# Allegro board motor_encoder_brd.brd
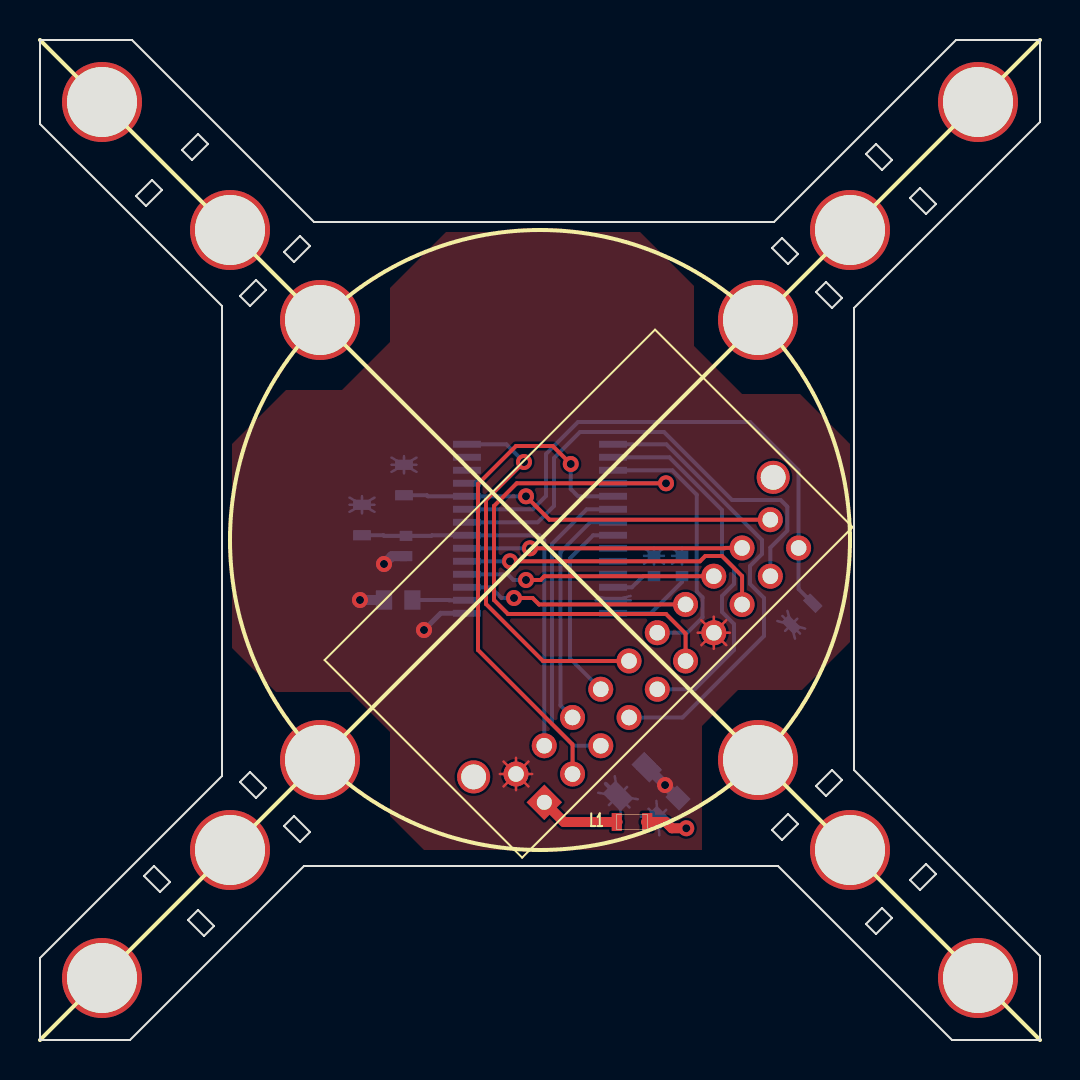
[diagram p0: board, top side]
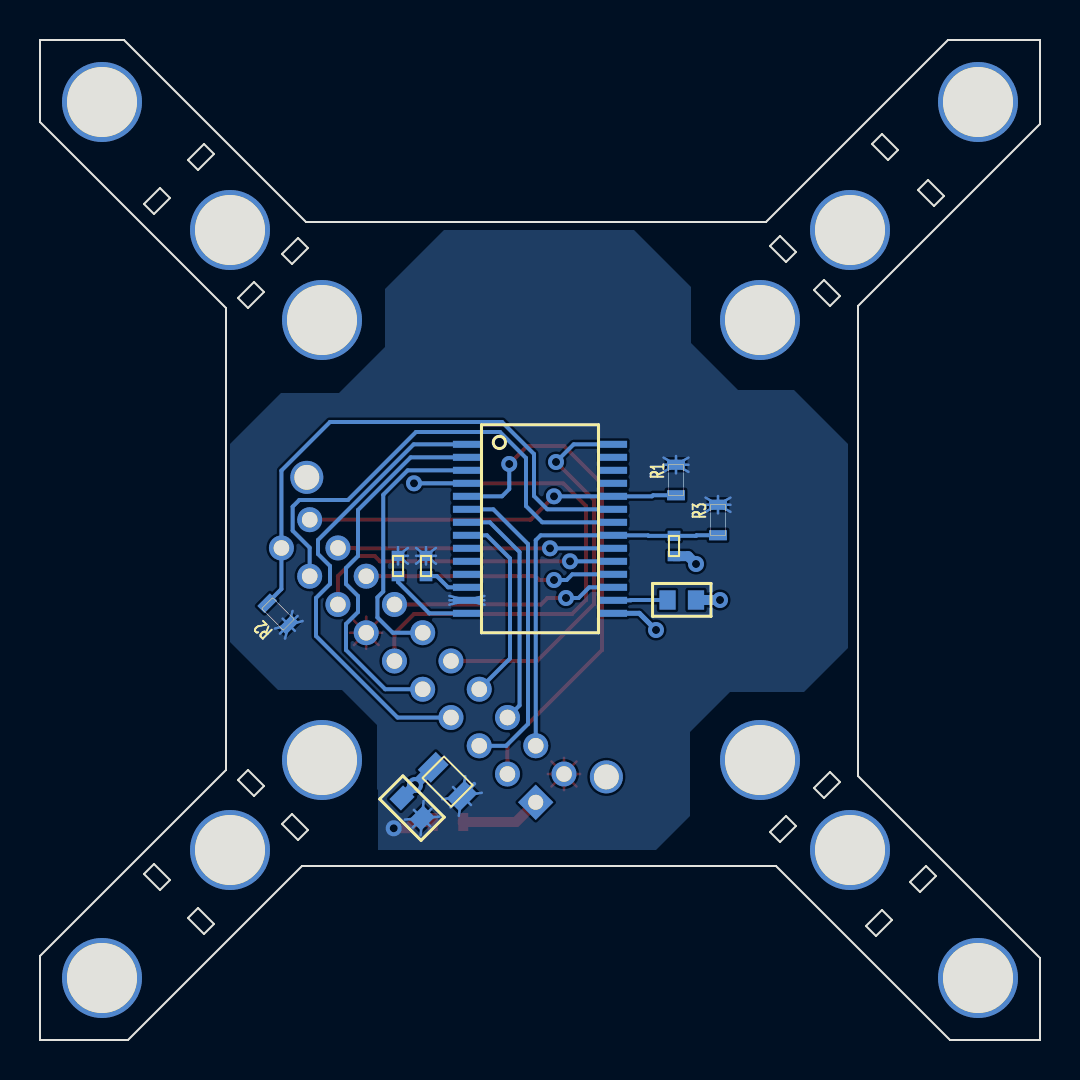
[diagram p1: board, bottom side, seen from below]

Outline 50 x 50 mm; copper layers: TOP, BOTTOM. Coordinates in mm from the lower left corner of the outline.
Outline path: 0,50 0,45.8 ; 0,50 0,45.8 ; 0,50 4.6,50 ; 0,50 4.6,50 ; 0,45.8 9.1,36.7 ; 0,45.8 9.1,36.7 ; 9.1,36.7 9.1,13.2 ; 9.1,36.7 9.1,13.2 ; 0,4.1 0,0 ; 0,4.1 0,0 ; 0,4.1 9.1,13.2 ; 0,4.1 9.1,13.2 ; 0,0 4.5,0 ; 0,0 4.5,0 ; 4.5,0 13.2,8.7 ; 4.5,0 13.2,8.7 ; 13.2,8.7 36.9,8.7 ; 13.2,8.7 36.9,8.7 ; 4.6,50 13.7,40.9 ; 4.6,50 13.7,40.9 ; 36.9,8.7 45.6,0 ; 36.9,8.7 45.6,0 ; 13.7,40.9 36.7,40.9 ; 13.7,40.9 36.7,40.9 ; 36.7,40.9 45.8,50 ; 36.7,40.9 45.8,50 ; 45.6,0 50,0 ; 45.6,0 50,0 ; 40.7,36.6 50,45.9 ; 40.7,36.6 50,45.9 ; 40.7,36.6 40.7,13.5 ; 40.7,36.6 40.7,13.5 ; 50,45.9 50,50 ; 50,45.9 50,50 ; 40.7,13.5 50,4.2 ; 40.7,13.5 50,4.2 ; 50,0 50,4.2 ; 50,0 50,4.2 ; 45.8,50 50,50 ; 45.8,50 50,50 ; 4.8,42.2 5.6,43 6.1,42.5 5.3,41.7 4.8,42.2 ; 5.2,8.2 5.7,8.7 6.5,7.9 6,7.4 5.2,8.2 ; 7.1,44.5 7.9,45.3 8.4,44.8 7.6,44 7.1,44.5 ; 7.4,6 7.9,6.5 8.7,5.7 8.2,5.2 7.4,6 ; 10,37.2 10.8,38 11.3,37.5 10.5,36.7 10,37.2 ; 10,12.9 10.5,13.4 11.3,12.6 10.8,12.1 10,12.9 ; 12.2,39.4 13,40.2 13.5,39.7 12.7,38.9 12.2,39.4 ; 12.2,10.7 12.7,11.2 13.5,10.4 13,9.9 12.2,10.7 ; 36.6,39.6 37.1,40.1 37.9,39.3 37.4,38.8 36.6,39.6 ; 36.6,10.5 37.4,11.3 37.9,10.8 37.1,10 36.6,10.5 ; 38.8,37.4 39.3,37.9 40.1,37.1 39.6,36.6 38.8,37.4 ; 38.8,12.7 39.6,13.5 40.1,13 39.3,12.2 38.8,12.7 ; 41.3,44.3 41.8,44.8 42.6,44 42.1,43.5 41.3,44.3 ; 41.3,5.8 42.1,6.6 42.6,6.1 41.8,5.3 41.3,5.8 ; 43.5,42.1 44,42.6 44.8,41.8 44.3,41.3 43.5,42.1 ; 43.5,8 44.3,8.8 44.8,8.3 44,7.5 43.5,8

## Design rules (mm)
constraint set DEFAULT: min track width 0.127

## Placement (name value [footprint] x y rotation side)
BR1  CIRCUIT BREAKER  [CAP0402]  18.3 24.7 90 bottom
BR2  CIRCUIT BREAKER  [CAP0402]  30.7 23.7 270 bottom
BR3  CIRCUIT BREAKER  [CAP0402]  32.1 23.7 270 bottom
C1  100n  [SMC0603]  17.2 22 0 bottom
C2  100n  [SMC0603]  31.9 12.1 225 bottom
C3  10u  [CAP0805]  28.9 12.2 45 bottom
J1  S20B-PADSS-1(LF)(SN)  [JST_PADSS_90DEG_10X2]  23.8 13.3 45 top
L1  BLM18PG300SN1D  [RES0603]  29.6 10.9 180 top
NOREF  -  []  9.5 40.5 0 top
NOREF#2  -  [unnamed#2]  14 14 0 top
NOREF#3  -  [unnamed#2]  46.9 3.1 0 top
NOREF#4  -  [unnamed#2]  3.1 46.9 0 top
NOREF#5  -  []  0 49.38 0 top
NOREF#6  -  [unnamed#2]  40.5 40.5 0 top
NOREF#7  -  [unnamed#2]  14 36 0 top
NOREF#8  -  []  14 36 0 top
NOREF#9  -  [unnamed#2]  35.9 14 0 top
NOREF#10  -  [unnamed#2]  9.5 40.5 0 top
NOREF#11  -  [unnamed#2]  40.5 9.5 0 top
NOREF#12  -  [unnamed#2]  3.1 3.1 0 top
NOREF#13  -  [unnamed#2]  35.9 36 0 top
NOREF#14  -  [unnamed#2]  46.9 46.9 0 top
NOREF#15  -  [unnamed#2]  9.5 9.5 0 top
NOREF#16  -  []  3.1 46.9 0 top
R1  51k  [RES0603]  18.2 28 90 bottom
R2  51k  [RES0603]  38.1 21.3 225 bottom
R3  51k  [RES0603]  16.1 26 90 bottom
U1  AM4096  [SSOP28-LD]  25 25.56 270 bottom

## Library data of the parts
BR1-BR3 = CIRCUIT BREAKER_0
C1 C2 = C
C3 = C_elect_0
J1 = HEADER 10X2
L1 = CHOKE HASH-IRON
R1-R3 = R
U1 = AM4096

## Footprints (pads in the part's own frame, mm; a bottom-side part is the same pattern mirrored in y, then rotated)
CAP0402
  rect 0.508x0.635 smd: 1(-0.508,0) 2(0.508,0)
CAP0805
  rect 0.914x1.27 smd: 1(0,0) 2(2.032,0)
JST_PADSS_90DEG_10X2
  round 1.65 hole 1.245: (-1.6,1.395) (19.582,1.395)
  rect 1.25x1.25 hole 0.75: 1(0,-2)
  round 1.25 hole 0.78: 2(0,0) 3(1.998,-2) 4(1.998,0) 5(3.996,-2) 6(3.996,0) 7(5.994,-2) 8(5.994,0) 9(7.992,-2) 10(7.992,0) 11(9.99,-2) 12(9.99,0) 13(11.988,-2) 14(11.988,0) 15(13.986,-2) 16(13.986,0) 17(15.984,-2) 18(15.984,0) 19(17.982,-2) 20(17.982,0)
RES0603
  rect 0.508x0.889 smd: 1(-0.762,0) 2(0.762,0)
SMC0603
  rect 0.813x0.965 smd: 1(0,0) 2(1.422,0)
SSOP28-LD
  rect 0.348x1.397 smd: 1(-4.225,-3.656) 2(-3.575,-3.656) 3(-2.925,-3.656) 4(-2.275,-3.656) 5(-1.625,-3.656) 6(-0.975,-3.656) 7(-0.325,-3.656) 8(0.325,-3.656) 9(0.975,-3.656) 10(1.625,-3.656) 11(2.275,-3.656) 12(2.925,-3.656) 13(3.575,-3.656) 14(4.225,-3.656) 15(4.225,3.656) 16(3.575,3.656) 17(2.925,3.656) 18(2.275,3.656) 19(1.625,3.656) 20(0.975,3.656) 21(0.325,3.656) 22(-0.325,3.656) 23(-0.975,3.656) 24(-1.625,3.656) 25(-2.275,3.656) 26(-2.925,3.656) 27(-3.575,3.656) 28(-4.225,3.656)
unnamed#2
  round 4 hole 3.5: 1(0,0)

## Nets
VIN: J1.1 L1.2
0: BR1.1 C1.1 C2.1 C3.2(-) J1.2 J1.13 U1.15
A: J1.11 U1.4
B: J1.12 U1.3
CLOCK: J1.10 U1.28
DATA: J1.7 U1.1
MAG: J1.14 U1.17
PSM: BR1.2 J1.4 R3.1 U1.21
REFN: J1.16 U1.18
REFP: J1.15 U1.19
RI: J1.9 U1.2
SCL: J1.20 R1.1 U1.24
SDA: J1.19 R2.1 U1.23
TD/PCOS: J1.8 U1.8
U/NSIN: J1.6 U1.7
V/PSIN: J1.5 U1.6
VEXT: BR2.1 BR3.1 C2.2 C3.1 L1.1 R1.2 R2.2 R3.2 U1.13
VOUT/TOUT: J1.18 U1.20
W/NCOS: J1.3 U1.5
ZERO: J1.17 U1.22(ZERO)
N01073: C1.2 U1.16
N03135: BR2.2 U1.12
N03141: BR3.2 U1.14

Pads without a net: NOREF#2 1; NOREF#3 1; NOREF#4 1; NOREF#6 1; NOREF#7 1; NOREF#9 1; NOREF#10 1; NOREF#11 1; NOREF#12 1; NOREF#13 1; NOREF#14 1; NOREF#15 1; U1 9 10 11 25 26 27

## Via types
v1: diameter 0.8, hole 0.4, TOP to BOTTOM, 13 vias

## Routing (per net, layer and track width the routed paths; a pad name or vN(x,y) marks a point on that pad's centre or on a via; arc(x,y) is an arc through that point)
VIN: length 4.1
  TOP w0.5: J1.1 26.2,10.9 L1.2 28.88,10.9
0: length 20.6
  TOP w0.127: 33.07,19.74 J1.13 ; J1.13 33.07,20.98 ; J1.13 33.69,21.17 ; J1.13 34.49,20.36 ; J1.13 34.31,20.98 ; J1.13 33.69,19.56 ; J1.13 32.89,20.36 ; J1.13 34.31,19.74 ; 23.18,13.92 J1.2 ; J1.2 23.18,12.68 ; J1.2 24.42,12.68 ; J1.2 23,13.3 ; J1.2 23.8,14.1 ; J1.2 24.42,13.92 ; J1.2 23.8,12.5 ; J1.2 24.6,13.3
  BOTTOM w0.25: v1(19.2,20.5) 20.04,21.34 U1.15
  BOTTOM w0.5: BR1.1 17.59,24.19 v1(17.2,23.8) ; C2.1 v1(31.25,12.75) 30.7,13.3 30.67,13.3 C3.2 ; C1.1 v1(16,22)
A: length 28.1
  TOP w0.2: J1.11 32.28,20.32 31.3,21.3 23.4,21.3 22.7,22 22.7,26.7 23.84,27.84 v1(31.3,27.84)
  BOTTOM w0.2: U1.4 v1(31.3,27.84)
B: length 13.5
  BOTTOM w0.2: 28.66,28.48 31.62,28.48 32.84,27.26 32.84,22.42 33.13,22.13 33.13,21.13 32.36,20.36 J1.12
CLOCK: length 19.4
  TOP w0.2: v1(24.2,28.9) 22.3,27 22.3,21.8 25.15,18.95 J1.10
  BOTTOM w0.2: v1(24.2,28.9) 23.32,29.79 U1.28
DATA: length 23.2
  BOTTOM w0.2: U1.1 31.32,29.79 36.1,25 36.1,24.3 35.5,23.7 35.5,22.8 36.2,22.1 36.2,20.2 32.12,16.12 J1.7
MAG: length 11.3
  TOP w0.2: J1.14 24.95,21.78 24.63,22.1 v1(23.7,22.1)
  BOTTOM w0.2: v1(23.7,22.1) 23.07,22.1 22.54,22.63 U1.17
PSM: length 19.5
  BOTTOM w0.2: J1.4 25.21,24.99 24.96,25.23 19.6,25.23 19.57,25.21 BR1.2 17.2,25.21 17.17,25.24 R3.1
REFN: length 12.5
  TOP w0.2: v1(24.3,23) 25.03,23 25.22,23.19 J1.16
  BOTTOM w0.2: U1.18 23.38,23.29 23.67,23 v1(24.3,23)
REFP: length 15.7
  TOP w0.2: v1(23.5,23.93) 33,23.93 33.27,24.2 34.1,24.2 35.1,23.2 J1.15
  BOTTOM w0.2: 21.34,23.93 v1(23.5,23.93)
RI: length 18.9
  BOTTOM w0.2: J1.9 32.74,17.54 34.7,19.5 34.7,20.8 34.1,21.4 34.1,22.2 34.7,22.8 34.7,23.6 34.1,24.2 34.1,26.5 31.46,29.13 U1.2
SCL: length 18.8
  TOP w0.2: J1.20 25.47,26.02 v1(24.3,27.18)
  BOTTOM w0.2: R1.1 19.35,27.24 19.4,27.18 U1.24 v1(24.3,27.18)
SDA: length 27.6
  BOTTOM w0.2: U1.23 24.64,26.54 25.3,27.2 25.3,29.3 26.9,30.9 35.5,30.9 37.93,28.47 J1.19 37.93,22.55 R2.1
TD/PCOS: length 9.8
  BOTTOM w0.2: J1.8 26.5,19.08 26.5,24.08 27.66,25.23 U1.8
U/NSIN: length 11.8
  BOTTOM w0.2: 28.66,25.89 27.51,25.89 26.02,24.4 26.02,16.73 J1.6
V/PSIN: length 15.7
  BOTTOM w0.2: U1.6 27.34,26.54 25.6,24.8 25.6,15.8 26.69,14.71 J1.5
VEXT: length 42.4
  TOP w0.5: v1(32.31,10.59) 31.6,10.59 31.28,10.9 L1.1 30.3,10.9
  BOTTOM w0.127: R1.2 18.82,28.41 ; R1.2 18.82,29.12 ; R1.2 17.58,29.12 ; R1.2 17.58,28.41 ; R1.2 17.58,28.76 ; R1.2 18.2,28.33 ; R1.2 18.82,28.76 ; R1.2 18.2,29.19 ; 36.87,20.95 R2.2 ; R2.2 37.87,21.07 ; R2.2 37.26,20.46 ; R2.2 37.75,20.07 ; R2.2 37.37,21.45 ; R2.2 38,20.32 ; R2.2 37.12,21.2 ; R2.2 38.25,20.57 ; 27.78,22.2 28.66,21.98 ; 28.66,21.98 29.53,22.2 ; 28.66,21.98 27.78,21.77 ; 28.66,21.98 27.78,21.98 ; 28.66,21.98 29.53,21.98 ; 28.66,21.98 29.53,21.77 ; BR3.1 32.1,24.64 ; BR3.1 31.6,24.21 ; BR3.1 32.1,23.78 ; BR3.1 31.6,23.81 ; BR3.1 31.6,24.6 ; C2.2 31.36,10.63 ; C2.2 30.03,11.17 ; C2.2 31.75,11.02 ; C2.2 30.48,10.68 ; C2.2 30.97,10.23 ; C2.2 30.82,11.95 ; C2.2 30.43,11.56 ; C2.2 31.31,11.51 ; C3.1 29.89,12.04 ; C3.1 29.35,12.65 ; C3.1 29.47,11.63 ; C3.1 27.91,12.36 ; C3.1 28.45,11.75 ; C3.1 29.06,11.21 ; C3.1 28.74,13.19 ; R3.2 16.1,27.19 ; R3.2 15.48,26.76 ; R3.2 16.72,27.12 ; R3.2 16.72,26.41 ; R3.2 16.1,26.33 ; R3.2 16.72,26.76 ; R3.2 15.48,26.41 ; R3.2 15.48,27.12 ; 30.2,24.21 BR2.1 ; BR2.1 30.2,24.6 ; BR2.1 31.2,24.6 ; BR2.1 31.2,23.81 ; BR2.1 30.7,24.64 ; BR2.1 31.2,24.21 ; BR2.1 30.7,23.78 ; BR2.1 30.2,23.81
  BOTTOM w0.2: 28.29,12.81 C3.1
VOUT/TOUT: length 13.8
  TOP w0.2: J1.18 34.25,24.6 34.23,24.59 v1(24.5,24.59)
  BOTTOM w0.2: U1.20 v1(24.5,24.59)
W/NCOS: length 25.8
  TOP w0.2: J1.3 26.63,14.77 21.9,19.5 21.9,27.8 23.8,29.7 25.64,29.7 v1(26.54,28.8)
  BOTTOM w0.2: 28.66,27.18 26.9,27.18 26.54,27.55 v1(26.54,28.8)
ZERO: length 24.7
  BOTTOM w0.2: J1.17 36.52,24.62 37.37,25.47 37.37,26.67 37.03,27 34.6,27 31.2,30.4 27,30.4 25.7,29.1 25.7,26.7 24.89,25.89 U1.22
N01073: length 2.7
  BOTTOM w0.2: C1.2 20.45,22 20.45,21.98 U1.16
N03135: length 2.3
  BOTTOM w0.2: U1.12 29.6,22.63 30.16,23.19 BR2.2
N03141: length 4.4
  BOTTOM w0.2: U1.14 30.54,21.34 32.1,22.9 BR3.2

## Copper pours and planes (outline as drawn; the poured copper is in the pictures)
0 on TOP: 9.6,29.8 9.6,19.6 11.8,17.4 15.5,17.4 17.5,15.4 17.5,11.2 19.2,9.5 33.1,9.5 33.1,15.7 34.9,17.5 38.1,17.5 40.5,19.9 40.5,29.8 38,32.3 35.1,32.3 32.7,34.7 32.7,37.7 30,40.4 20.3,40.4 17.5,37.6 17.5,34.9 15.1,32.5 12.3,32.5 ; 2 cut-outs
VEXT on BOTTOM: 9.6,29.8 9.6,19.6 11.8,17.4 15.5,17.4 17.5,15.4 17.5,11.2 19.2,9.5 33.1,9.5 33.1,12.5 33.15,12.55 33.15,15.75 34.9,17.5 38.1,17.5 40.5,19.9 40.5,29.8 37.95,32.35 35.05,32.35 32.75,34.65 32.75,37.55 29.8,40.5 20.3,40.5 17.45,37.65 17.45,34.85 15.1,32.5 12.3,32.5 ; 12 cut-outs
